# EAGLE board URFID (EAGLE 8.7.0)
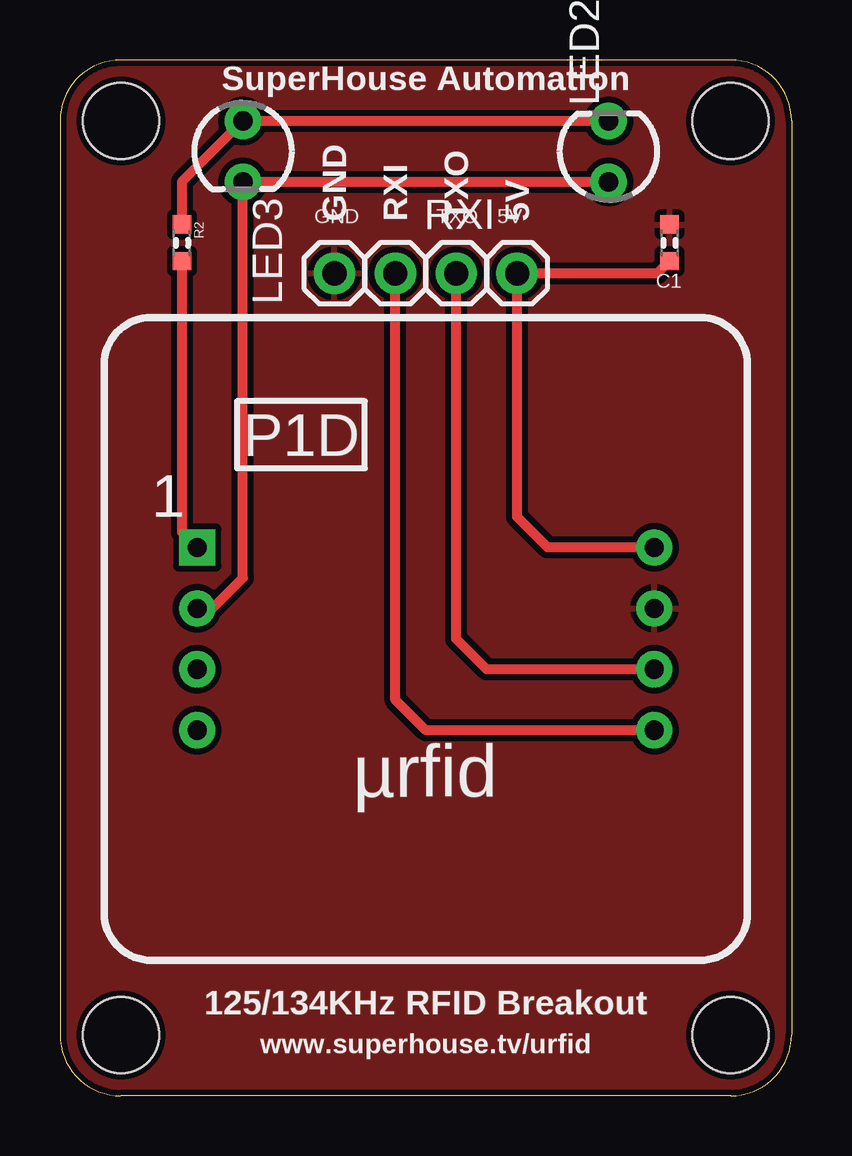
[diagram p0: board, top side]
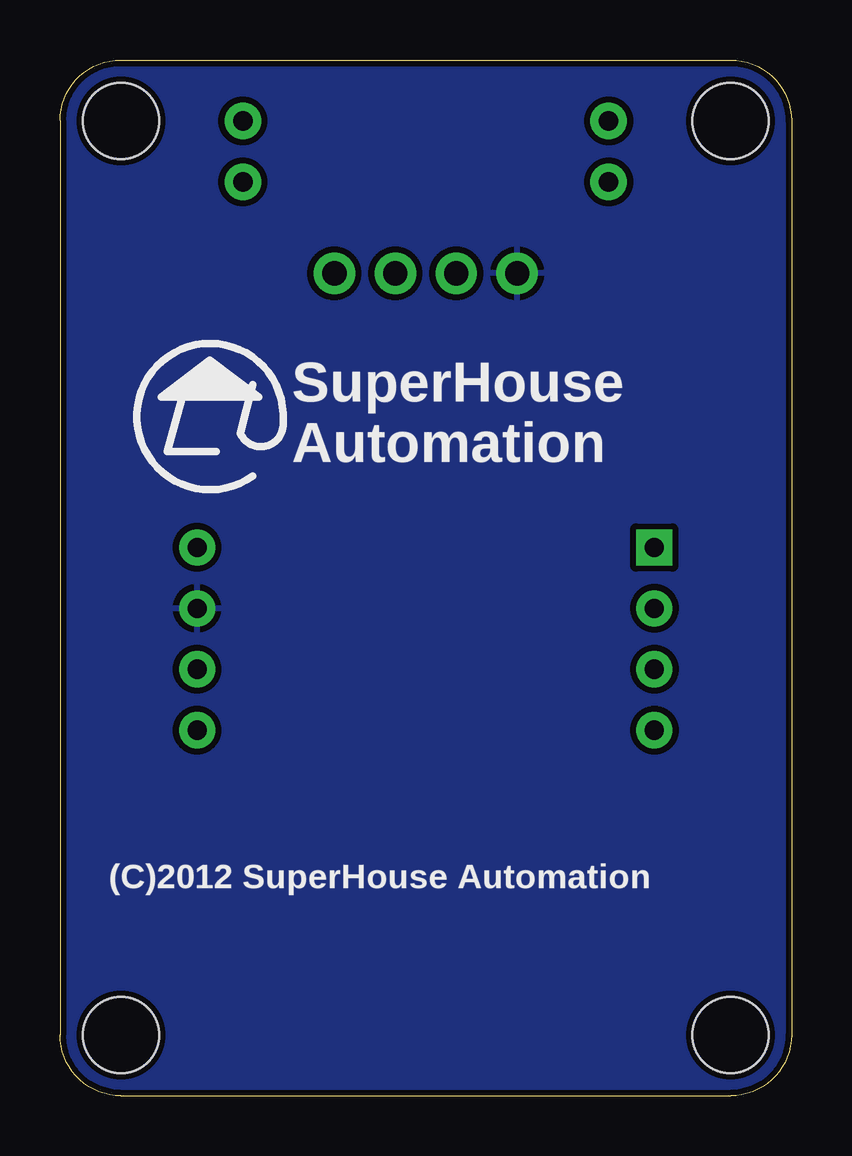
[diagram p1: board, bottom side, seen from below]

Size 30.48 x 43.18 mm. Coordinates in mm from the lower left corner, seen from the top.
Outline: 2.54,43.18 arc90 0,40.64 0,2.54 arc90 2.54,0 27.94,0 arc90 30.48,2.54 30.48,40.64 arc90 27.94,43.18 2.54,43.18
Copper layers (1*16): Top 0.035mm / dielectric 1.5mm / Bottom 0.035mm
Design rules "default *": minimum track width 8mil, minimum drill 15mil, track to track 10mil, track to pad 10mil, pad to pad 10mil, via to via 10mil, smd to smd 8mil, copper to edge 10mil, drill to drill 8mil, minimum pad ring 14mil, minimum via ring 8mil, stop-mask expansion 4mil, vias tented up to drill 25mil, thermal gap 10mil
Holes 3.17 mm at 2.54,40.64 2.54,2.54 27.94,40.64 27.94,2.54

## Footprints (pad centres in the part's own frame; a part is rotated, then mirrored left to right if it is on the bottom)
1X01 = drill 1.016: 1 0,0
0603 = smd 0.762 x 0.762: 1 -0.762,0; 2 0.762,0
URFID = drill 0.8: 5V 9.525,3.81; BUZZ -9.525,-1.27; GND 9.525,1.27; LED- -9.525,1.27; RESET -9.525,-3.81; RXI 9.525,-3.81; TXO 9.525,-1.27 | drill 0.8 square: LED+ -9.525,3.81
LED3MM = drill 0.813: A -1.27,0; K 1.27,0

## Placement (x,y rotation side)
5V  M01PTH  [1X01]  19.05,34.29 270 top
C1  100nF  [0603]  25.4,35.56 90 top
GND  M01PTH  [1X01]  11.43,34.29 270 top
IC1  P1D-URFID  [URFID]  15.24,19.05 0 top
LED2  GREEN  [LED3MM]  22.86,39.37 90 top
LED3  RED  [LED3MM]  7.62,39.37 270 top
R2  1K  [0603]  5.08,35.56 270 top
RXI  M01PTH  [1X01]  13.97,34.29 0 top
TXO  M01PTH  [1X01]  16.51,34.29 270 top

## Library data of the parts
5V GND R2 RXI TXO = freetronics-master-v1
C1 = freetronics-master-v1.1
IC1 LED2 LED3 = freetronics-jon

## Nets
GND: C1.2 GND.1 IC1.GND
N$2: IC1.LED+ R2.2
N$3: LED2.K LED3.A R2.1
N$4: IC1.LED- LED2.A LED3.K
N$5: IC1.RXI RXI.1
N$6: IC1.TXO TXO.1
VCC: 5V.1 C1.1 IC1.5V

## Tracks (layer width: path | path; a pad name or v marks a point on that pad's centre or on a via)
GND
  pour Bottom: 30.48,40.64 arc90 27.94,43.18 2.54,43.18 arc90 0,40.64 0,2.54 arc90 2.54,0 27.94,0 arc90 30.48,2.54
  pour Top: 27.94,43.18 2.54,43.18 arc90 0,40.64 0,2.54 arc90 2.54,0 27.94,0 arc90 30.48,2.54 30.48,40.64 arc90
N$2
  Top 0.406: R2.2 5.08,23.5 IC1.LED+
N$3
  Top 0.406: R2.1 5.08,38.1 LED3.A LED2.K
N$4
  Top 0.406: IC1.LED- 6.35,20.32 7.62,21.59 LED3.K LED2.A
N$5
  Top 0.406: IC1.RXI 15.24,15.24 13.97,16.51 RXI.1
N$6
  Top 0.406: IC1.TXO 17.78,17.78 16.51,19.05 TXO.1
VCC
  Top 0.406: IC1.5V 20.32,22.86 19.05,24.13 5V.1 24.89,34.29 C1.1

## Text on the board
tPlace: SuperHouse Automation | GND | RXI | TXO | 5V | 125/134KHz RFID Breakout | www.superhouse.tv/urfid
bPlace: SuperHouse / Automation | (C)2012 SuperHouse Automation